# Altium PCB Module 19 PCB Custom Grid Manager.PcbDoc (part 2 of 2)
Units mil, origin at the board's own origin, x right, y up, seen from the top; angles counter-clockwise.
Board outline 4005 x 4000 mil, 2 copper layers (Top Layer, Bottom Layer), stack 26.8 mil thick; 53 components, 70 nets, 266 pads, 11 vias.
Unrouted connection lines stored in the file: 161.
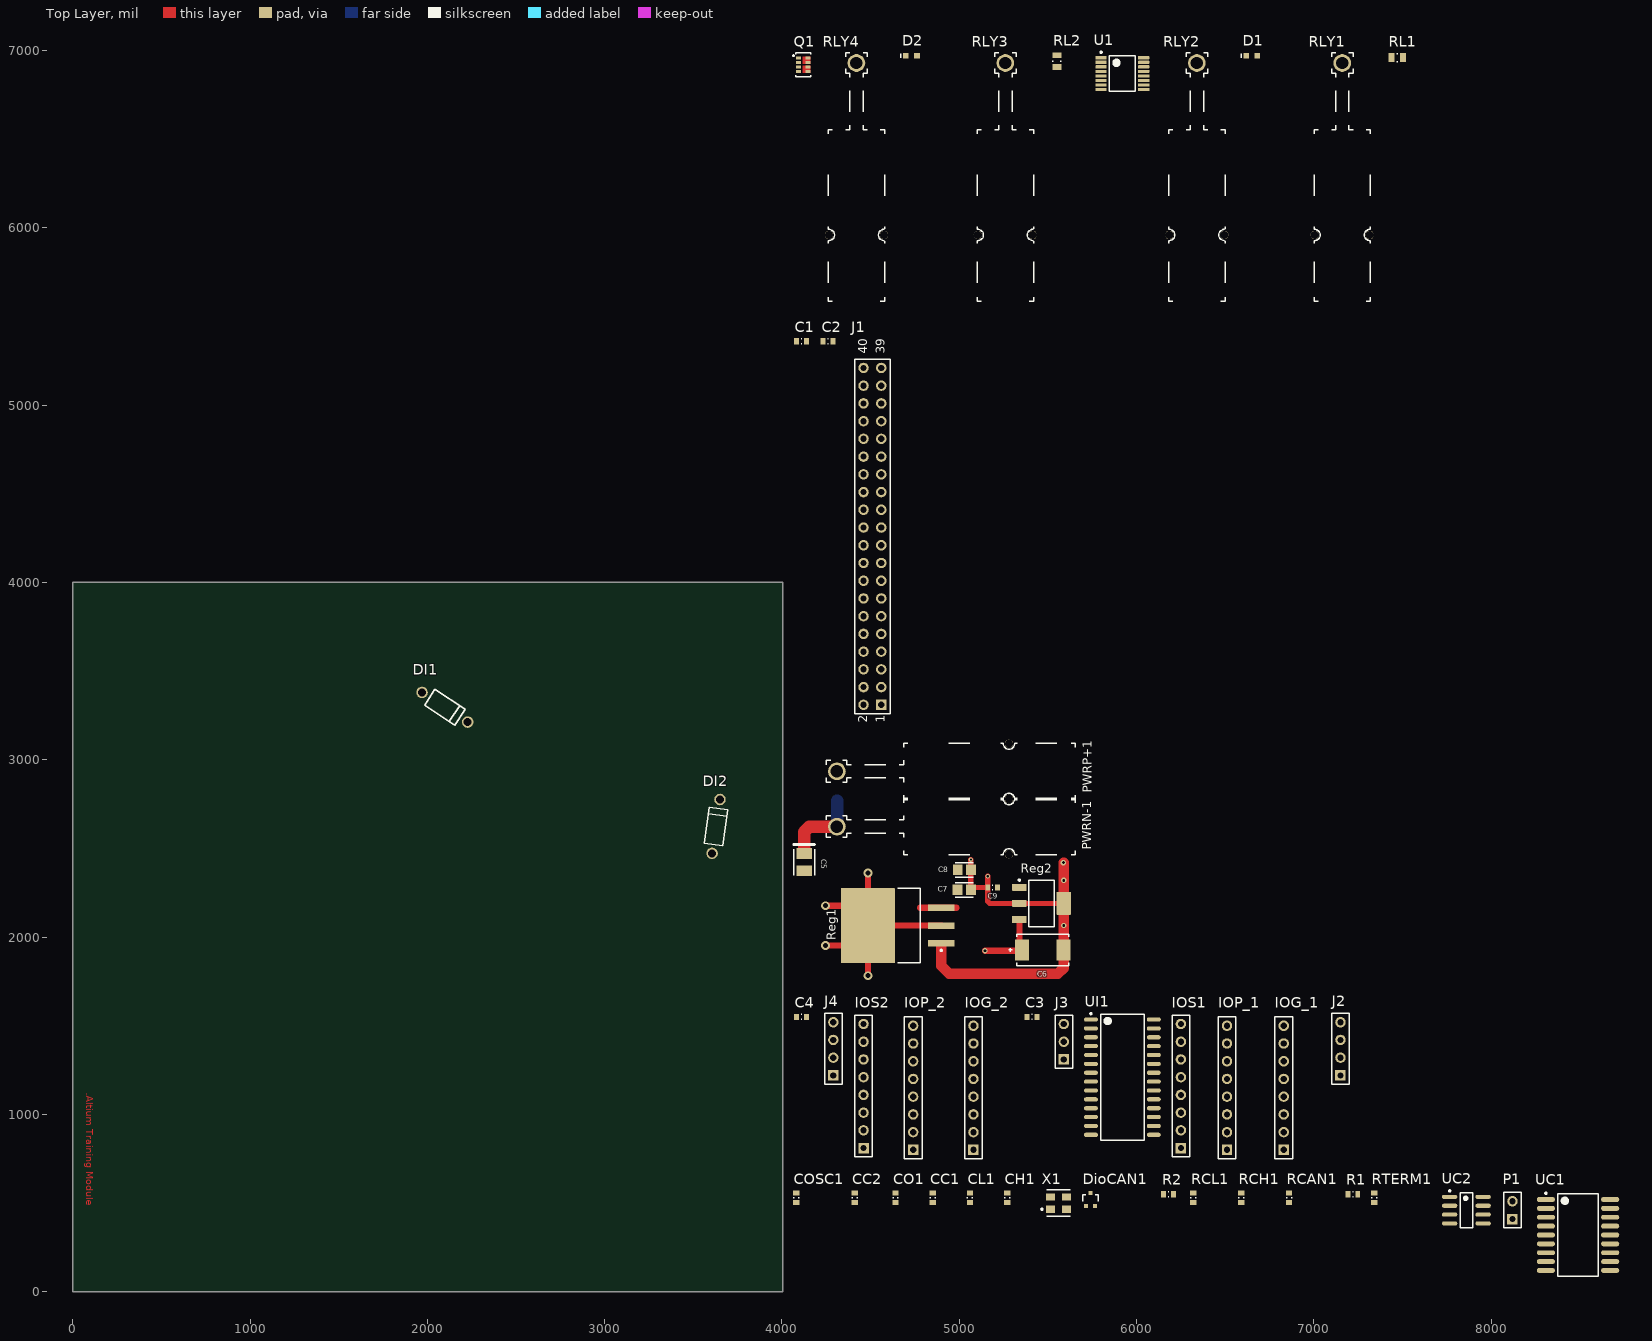
[diagram p0: Top Layer view]

## Silkscreen, mask and mechanical layers (free items; w line width, h text height) (continued)
22_TITLE_BLOCK_MIRRORED: (continued)
  text "A" at 8937.85,6027.61 h76
  text "T" at 9001.2,6027.61 h76
  text "N" at 9049.55,6027.61 h76
  text "E" at 9096.22,6027.61 h76
  text "M" at 9154.57,6027.61 h76
  text "U" at 9204.58,6027.61 h76
  text "C" at 9254.6,6027.61 h76
  text "O" at 9309.61,6027.61 h76
  text "D" at 9359.62,6027.61 h76
  text "S" at 9424.64,6027.61 h76
  text "I" at 9444.64,6027.61 h76
  text "H" at 9494.66,6027.61 h76
  text "T" at 9538,6027.61 h76
  text "REVISIONS" at -2890,5995 h60
  text "Y" at 7550.14,5947.59 h76
  text "A" at 7595.15,5947.59 h76
  text "M" at 7653.5,5947.59 h76
  text "D" at 7723.52,5947.59 h76
  text "N" at 7773.53,5947.59 h76
  text "A" at 7820.21,5947.59 h76
  text "D" at 7888.56,5947.59 h76
  text "E" at 7935.24,5947.59 h76
  text "T" at 7978.58,5947.59 h76
  text "I" at 7998.59,5947.59 h76
  text "M" at 8055.27,5947.59 h76
  text "I" at 8075.27,5947.59 h76
  text "L" at 8113.61,5947.59 h76
  text "M" at 8190.3,5947.59 h76
  text "U" at 8240.31,5947.59 h76
  text "I" at 8260.32,5947.59 h76
  text "T" at 8303.66,5947.59 h76
  text "L" at 8340.34,5947.59 h76
  text "A" at 8387.02,5947.59 h76
  text "F" at 8450.36,5947.59 h76
  text "O" at 8503.71,5947.59 h76
  text "Y" at 8568.73,5947.59 h76
  text "T" at 8612.07,5947.59 h76
  text "R" at 8660.42,5947.59 h76
  text "E" at 8707.09,5947.59 h76
  text "P" at 8753.77,5947.59 h76
  text "O" at 8807.82,5947.59 h76
  text "R" at 8857.83,5947.59 h76
  text "P" at 8904.51,5947.59 h76
  text "E" at 8969.53,5947.59 h76
  text "H" at 9019.54,5947.59 h76
  text "T" at 9062.88,5947.59 h76
  text "S" at 9127.9,5947.59 h76
  text "I" at 9147.9,5947.59 h76
  text "H" at 9216.25,5947.59 h76
  text "T" at 9259.6,5947.59 h76
  text "I" at 9277.94,5947.59 h76
  text "W" at 9346.29,5947.59 h76
  text "E" at 9391.3,5947.59 h76
  text "R" at 9441.31,5947.59 h76
  text "E" at 9487.99,5947.59 h76
  text "H" at 9538,5947.59 h76
  text "DATE" at -4055,5870 h60
  text "REV" at -1635,5870 h60
  text "ZONE" at -1305,5870 h60
  text "E" at 7769.92,5867.57 h76
  text "R" at 7819.93,5867.57 h76
  text "A" at 7866.61,5867.57 h76
  text "S" at 7931.63,5867.57 h76
  text "T" at 7974.97,5867.57 h76
  text "H" at 8023.32,5867.57 h76
  text "G" at 8078.33,5867.57 h76
  text "I" at 8098.34,5867.57 h76
  text "R" at 8146.68,5867.57 h76
  text "O" at 8221.7,5867.57 h76
  text "N" at 8271.71,5867.57 h76
  text "." at 8310.05,5867.57 h76
  text "E" at 8356.73,5867.57 h76
  text "L" at 8395.08,5867.57 h76
  text "O" at 8450.09,5867.57 h76
  text "H" at 8498.43,5867.57 h76
  text "W" at 8566.78,5867.57 h76
  text "N" at 8633.47,5867.57 h76
  text "I" at 8653.47,5867.57 h76
  text "D" at 8721.82,5867.57 h76
  text "E" at 8768.5,5867.57 h76
  text "T" at 8811.85,5867.57 h76
  text "U" at 8861.86,5867.57 h76
  text "B" at 8908.54,5867.57 h76
  text "I" at 8928.54,5867.57 h76
  text "R" at 8976.89,5867.57 h76
  text "T" at 9019.54,5867.57 h76
  text "S" at 9066.22,5867.57 h76
  text "I" at 9084.55,5867.57 h76
  text "D" at 9134.57,5867.57 h76
  text "Y" at 9201.25,5867.57 h76
  text "L" at 9239.59,5867.57 h76
  text "E" at 9286.27,5867.57 h76
  text "E" at 9331.28,5867.57 h76
  text "R" at 9381.29,5867.57 h76
  text "F" at 9424.64,5867.57 h76
  text "E" at 9491.32,5867.57 h76
  text "B" at 9538,5867.57 h76
  text "APPROVED" at -4560,5865 h60
  text "DESCRIPTION" at -2650,5865 h60
  text "." at 7617.96,5787.55 h76
  text "N" at 7666.3,5787.55 h76
  text "E" at 7712.98,5787.55 h76
  text "V" at 7759.66,5787.55 h76
  text "I" at 7779.66,5787.55 h76
  text "G" at 7834.68,5787.55 h76
  text "E" at 7895.93,5787.55 h76
  text "E" at 7942.61,5787.55 h76
  text "T" at 7985.95,5787.55 h76
  text "N" at 8034.3,5787.55 h76
  text "A" at 8080.97,5787.55 h76
  text "R" at 8130.99,5787.55 h76
  text "A" at 8177.66,5787.55 h76
  text "W" at 8246.02,5787.55 h76
  text "D" at 8312.7,5787.55 h76
  text "E" at 8359.38,5787.55 h76
  text "I" at 8379.38,5787.55 h76
  text "L" at 8416.06,5787.55 h76
  text "P" at 8462.73,5787.55 h76
  text "M" at 8521.08,5787.55 h76
  text "I" at 8541.09,5787.55 h76
  text "R" at 8609.44,5787.55 h76
  text "O" at 8664.45,5787.55 h76
  text "S" at 8729.47,5787.55 h76
  text "S" at 8776.15,5787.55 h76
  text "E" at 8822.82,5787.55 h76
  text "R" at 8872.84,5787.55 h76
  text "P" at 8919.51,5787.55 h76
  text "X" at 8964.53,5787.55 h76
  text "E" at 9011.2,5787.55 h76
  text "R" at 9081.22,5787.55 h76
  text "O" at 9136.23,5787.55 h76
  text "D" at 9204.58,5787.55 h76
  text "E" at 9251.26,5787.55 h76
  text "V" at 9297.94,5787.55 h76
  text "R" at 9347.95,5787.55 h76
  text "E" at 9394.63,5787.55 h76
  text "S" at 9441.31,5787.55 h76
  text "E" at 9487.99,5787.55 h76
  text "R" at 9538,5787.55 h76
  text "ORIGINAL" at -2725,5735 h60
  text "A" at -1665,5735 h60
  text "D" at -5125,5027 h70
  text "D" at 9675,5027 h70
  text "C" at -5125,2647 h70
  text "C" at 9675,2647 h70
  text "B" at -5125,272 h70
  text "B" at 9675,272 h70
  text "DWG. NO." at -5165,-325.1 h30 r90
  text ".PCB_DWG_NO" at -5075,-540 h50 r90
  text "REV:" at -5165,-1335.1 h30 r90
  text ".PCB_REV" at -5075,-1350 h50 r90
  text ".PCB_PART_NUMBER" at 585,-1390 h45
  text "PART NO." at 900,-1390 h45
  text "UNLESS OTHERWISE SPECIFIED DIMENSIONS" at 880,-1495 h45
  text "DATE" at -1636,-1497.1 h45
  text "APPROVALS" at -776,-1497.1 h45
  text "2175 SALK AVENUE" at -3855,-1500 h45
  text "AND TOLERANCE ARE IN INCHES AND" at 825,-1570 h45
  text "DESIGNER:" at -456,-1577.1 h45
  text "SUITE 200" at -3855,-1590 h45
  text "APPLY TO THE FINISHED PART" at 715,-1640 h45
  text ".PCB_DESIGNER_APP_DATE" at -1508,-1657.1 h40
  text ".PCB_DESIGNER" at -778,-1657.1 h60
  text "CARLSBAD, CA 92008" at -3855,-1680.01 h45
  text "TOLERANCE ON:" at 475,-1765 h45
  text "USA" at -3855,-1770 h45
  text "ENGINEER:" at -456,-1777.1 h45
  text ".PCB_ENGINEER_APP_DATE" at -1508,-1847.1 h40
  text "ANGLES" at -110,-1855 h40
  text "3 DEC. PLACE" at 425,-1855 h40
  text "2 DEC. PLACE" at 880,-1855 h40
  text ".PCB_ENGINEER" at -778,-1857.1 h60
  text "TITLE:" at -1970,-1875 h45
  text "CHECKER:" at -456,-1977.1 h45
  text ".PCB_ANG_TOL" at -75,-2010 h60
  text ".PCB_3_DEC_TOL" at 390,-2010 h60
  text ".PCB_2_DEC_TOL" at 825,-2010 h60
  text ".Pcb_File_Name_No_Path" at -2110,-2050 h100
  text ".PCB_CHECKER_APP_DATE" at -1506,-2051.1 h40
  text ".PCB_CHECKER" at -778,-2057.1 h60
  text "THIRD ANGLE PROJECTION" at 1653,-2070.1 h40
  text "A" at -5125,-2098 h70
  text "A" at 9675,-2098 h70
  text "MATERIAL:" at 880,-2153.1 h45
  text "REFERENCE DOCUMENTS" at -836,-2197.1 h45
  text ".Altium Training Module" at -2110,-2250 h100
  text "BOM:" at -456,-2297.1 h45
  text "SEE NOTES" at 514,-2352.1 h60
  text ".DOC_NO_BOM" at -776,-2387.1 h60
  text ".Altium Training" at -2110,-2450 h80
  text "ASSY DWG:" at -456,-2487.1 h45
  text ".DOC_NO_ASSY_DWG" at -776,-2577.1 h60
  text "REV:" at -4835,-2610 h45
  text "DWG NO:" at -3275,-2610 h45
  text "CAGE CODE:" at -2275,-2610 h45
  text "SIZE:" at -2030,-2610 h45
  text "FAB DWG:" at -456,-2677.1 h45
  text ".PCB_DWG_NO" at -3500,-2750 h100
  text "B" at -2070,-2755 h100
  text ".DOC_NO_FAB_DWG" at -776,-2762.1 h60
  text ".CAGE_CODE" at -2445,-2765 h100
  text ".PCB_REV" at -4815.19,-2771.66 h100
  text "SCHEMATIC:" at -456,-2867.1 h45
  text "PRINT DATE:" at 888,-2868.1 h45
  text "SHEET:" at -4315,-2925.1 h45
  text "FILE NAME:" at -2575,-2925.1 h45
  text "SCALE:" at -1970,-2925 h45
  text ".PRINT_DATE" at 480,-2937.1 h60
  text ".Printout_Name" at 9494,-2947 h150
  text ".DOC_NO_SCH_DWG" at -776,-2957.1 h60
  text ".PCB_FILE_NAME_NO_PATH" at -2918,-2970.1 h60
  text "OF" at -4765,-2975.1 h45
  text ".PCB_SCALE" at -2240,-2975 h60
  text "DOC-104 REV A" at 9550,-3042.1 h20
  text "1" at -3977,-3130 h70
  text "2" at -1472,-3130 h70
  text "3" at 1026.99,-3130 h70
  text "4" at 3533.66,-3130 h70
  text "5" at 6023,-3130 h70
  text "6" at 8518.66,-3130 h70

## Dimensions
0,0 to 0,4000 on 2_DIMENSION
0,0 to 4005,0 on 2_DIMENSION

## Text inside footprints (layer, text, board x,y; h text height)
J1: Top Overlay "1" at 4580,3210 h50 r90; Top Overlay "2" at 4480,3210 h50 r90; Top Overlay "40" at 4480,5290 h50 r90; Top Overlay "39" at 4580,5290 h50 r90